# EAGLE board ESC (EAGLE 7.1.0)
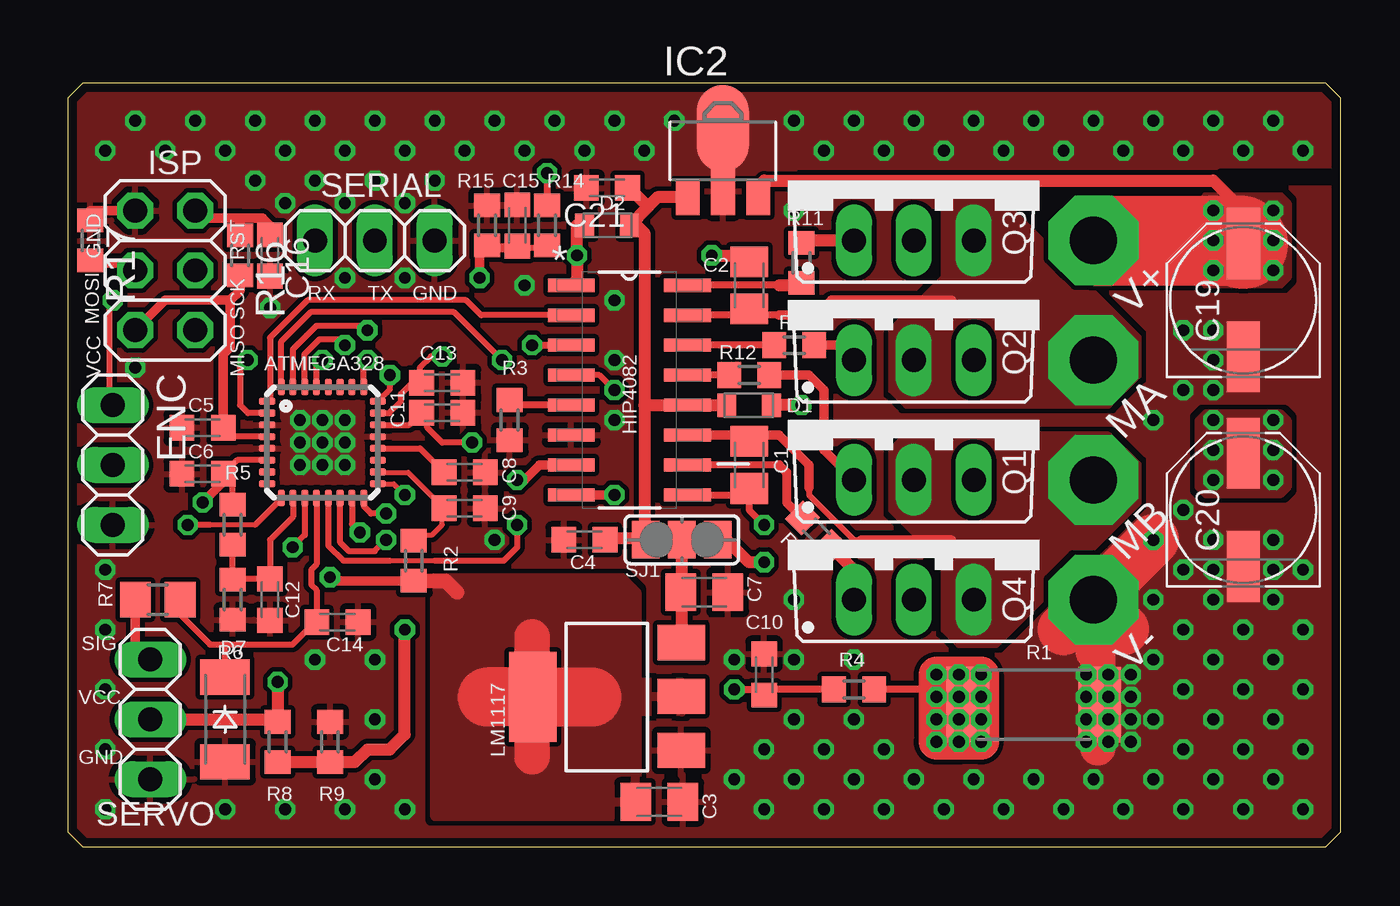
[diagram p0: board, top side]
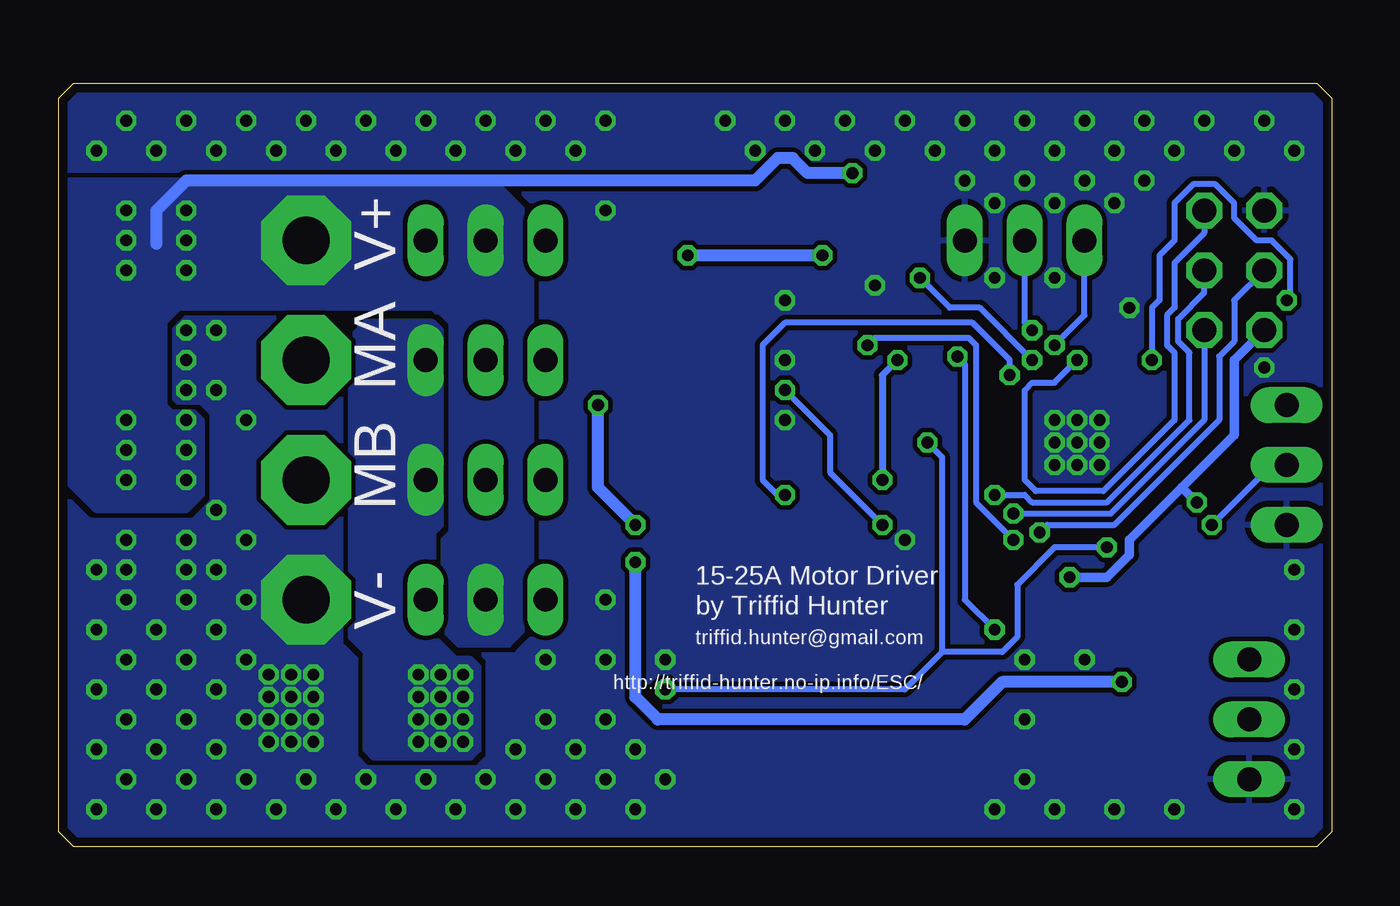
[diagram p1: board, bottom side, seen from below]

Size 53.98 x 32.39 mm. Coordinates in mm from the lower left corner, seen from the top.
Outline: 0,0.64 0.64,0 53.34,0 53.97,0.64 53.97,31.75 53.34,32.39 0.64,32.39 0,31.75 0,0.64
Copper layers (1*16): Top 0.0356mm / dielectric 1.5011mm / Bottom 0.0356mm
Design rules "default *": minimum track width 6mil, minimum drill 13mil, track to track 6mil, track to pad 6mil, pad to pad 6mil, via to via 6mil, smd to smd 6mil, copper to edge 15mil, drill to drill 6mil, minimum pad ring 7mil, minimum via ring 7mil, stop-mask expansion 4mil, vias tented up to drill 0.55mm, thermal gap 10mil
tRestrict: area 48.9,28.3 to 56.2,28.6; 4 lines

## Footprints (pad centres in the part's own frame; a part is rotated, then mirrored left to right if it is on the bottom)
MLF32 = smd 0.7 x 0.3: 1 -2.35,1.75; 2 -2.35,1.25; 3 -2.35,0.75; 4 -2.35,0.25; 5 -2.35,-0.25; 6 -2.35,-0.75; 7 -2.35,-1.25; 8 -2.35,-1.75; 17 2.35,-1.75; 18 2.35,-1.25; 19 2.35,-0.75; 20 2.35,-0.25; 21 2.35,0.25; 22 2.35,0.75; 23 2.35,1.25; 24 2.35,1.75 | smd 0.3 x 0.7: 9 -1.75,-2.35; 10 -1.25,-2.35; 11 -0.75,-2.35; 12 -0.25,-2.35; 13 0.25,-2.35; 14 0.75,-2.35; 15 1.25,-2.35; 16 1.75,-2.35; 25 1.75,2.35; 26 1.25,2.35; 27 0.75,2.35; 28 0.25,2.35; 29 -0.25,2.35; 30 -0.75,2.35; 31 -1.25,2.35; 32 -1.75,2.35
C0805K = smd 1.3 x 1.6: 1 -1,0; 2 1,0
C0603K = smd 1.05 x 1.08: 1 -0.875,0; 2 0.875,0
PANASONIC_D = smd 3 x 1.4: + 2.4,0; - -2.4,0
SOD110-R = smd 0.8 x 1: A 0.95,0; C -0.95,0
SOD-123_MINI-SMA = smd 1.5 x 2.1: A 1.8,0; C -1.8,0
1X03 = drill 1.016 long: 1 -2.54,0; 2 0,0; 3 2.54,0
SOIC127P600X175-16N = smd 1.981 x 0.559: 1 -2.464,4.445; 2 -2.464,3.175; 3 -2.464,1.905; 4 -2.464,0.635; 5 -2.464,-0.635; 6 -2.464,-1.905; 7 -2.464,-3.175; 8 -2.464,-4.445; 9 2.464,-4.445; 10 2.464,-3.175; 11 2.464,-1.905; 12 2.464,-0.635; 13 2.464,0.635; 14 2.464,1.905; 15 2.464,3.175; 16 2.464,4.445
SOT89 = smd 1 x 1.5: 1 -1.499,-1.981; 3 1.499,-1.981 | smd 1 x 2: 2 0,-1.727 | smd 2.2 x 3.7: 2@1 0,0.94
2X03 = drill 1.016 octagon: 1 -2.54,-1.27; 2 -2.54,1.27; 3 0,-1.27; 4 0,1.27; 5 2.54,-1.27; 6 2.54,1.27
SOT223 = smd 1.499 x 2.007: 1 -2.261,-3.15; 2 0.025,-3.15; 3 2.311,-3.15 | smd 3.81 x 2.007: 4 0,3.15
TO220BV = drill 1.016 long: D 0,-2.54; G -2.54,-2.54; S 2.54,-2.54
R2512 = smd 1.8 x 3.2: 1 -2.8,0; 2 2.8,0
R0603 = smd 1 x 1.1: 1 -0.85,0; 2 0.85,0
R0805 = smd 1.3 x 1.5: 1 -0.95,0; 2 0.95,0
SJ_2 = smd 1.168 x 1.6: 1 -1.524,0; 2 0,0; 3 1.524,0

## Placement (x,y rotation side)
ATMEGA328  ATMEGA328  [MLF32]  10.79,17.14 0 top
C1  10uF  [C0805K]  28.89,16.19 90 top
C2  10uF  [C0805K]  28.89,23.81 270 top
C3  10uF  [C0805K]  25.08,1.9 0 top
C4  100nF  [C0603K]  21.91,13.02 180 top
C5  100nF  [C0603K]  5.71,17.78 180 top
C6  100nF  [C0603K]  5.71,15.81 180 top
C7  10uF  [C0805K]  26.99,10.79 0 top
C8  100nF  [C0603K]  16.83,15.88 0 top
C9  100nF  [C0603K]  16.83,14.35 0 top
C10  100nF  [C0603K]  29.53,7.3 90 top
C11  100nF  [C0603K]  15.88,18.41 0 top
C12  100nF  [C0603K]  8.57,10.48 270 top
C13  100nF  [C0603K]  15.88,19.68 0 top
C14  1nF  [C0603K]  11.43,9.53 0 top
C15  100nF  [C0603K]  19.05,26.35 90 top
C16  100nF  [C0603K]  8.57,25.08 270 top
C19  100uF  [PANASONIC_D]  49.85,23.18 90 top
C20  100uF  [PANASONIC_D]  49.85,14.29 90 top
C21  100nF  [C0603K]  22.86,27.94 180 top
D1  D  [SOD110-R]  28.89,18.73 180 top
D2  D  [SOD110-R]  22.86,26.35 0 top
D7  3.3v  [SOD-123_MINI-SMA]  6.67,5.4 270 top
ENC  ENC  [1X03]  1.9,16.19 270 top
HIP4082  HIP4082  [SOIC127P600X175-16N]  23.81,19.37 0 top
IC2  78L12F  [SOT89]  27.78,29.53 0 top
ISP  [2X03]  4.13,24.45 90 top
LM1117  REG1117  [SOT223]  22.86,6.35 90 top
Q1  IRL1404Z  [TO220BV]  35.88,18.1 0 top
Q2  IRL1404Z  [TO220BV]  35.88,23.18 0 top
Q3  IRL1404Z  [TO220BV]  35.88,28.26 0 top
Q4  IRL1404Z  [TO220BV]  35.88,13.02 0 top
R1  0R005  [R2512]  40.96,6.03 0 top
R2  22R  [R0603]  14.67,12.13 270 top
R3  50k  [R0603]  18.73,18.1 90 top
R4  1k  [R0603]  33.34,6.67 0 top
R5  33k  [R0603]  6.99,13.65 90 top
R6  10k  [R0603]  6.99,10.48 90 top
R7  330  [R0805]  3.81,10.48 0 top
R8  6k8  [R0603]  8.89,4.45 90 top
R9  1k  [R0603]  11.11,4.45 270 top
R10  22R  [R0603]  31.75,13.34 315 top
R11  22R  [R0603]  31.11,24.77 90 top
R12  22R  [R0603]  28.89,20 0 top
R13  22R  [R0603]  30.8,21.27 0 top
R14  33k  [R0603]  20.32,26.35 90 top
R15  1k  [R0603]  17.78,26.35 270 top
R16  1k  [R0603]  7.3,25.08 270 top
R17  1k  [R0603]  0.95,25.72 270 top
SERIAL  SERIAL  [1X03]  13.02,25.72 0 top
SERVO  SERVO  [1X03]  3.49,5.4 270 top
SJ1  [SJ_2]  26.04,13.02 0 top

## Library data of the parts
ATMEGA328 = ATMEGA48-88-168-328
C1-C16 C19-C21 R1-R17 = rcl
D1 D2 D7 = diode
ENC ISP SERIAL SERVO = pinhead
HIP4082 = HIP4082; MPN: HIP4082IBZ; OC_FARNELL: 1561948; OC_NEWARK: 61J5960; PACKAGE: SOIC-16; SUPPLIER: INTERSIL
IC2 = linear
LM1117 = burr-brown; MPN: REG1117; OC_FARNELL: 1097566; OC_NEWARK: 14P6981
Q1-Q4 = transistor-power
SJ1 = jumper

## Nets
+5V: ATMEGA328.4 ATMEGA328.6 C3.1 C5.1 C6.1 ISP.2 LM1117.2 R2.2 R5.2 R16.2
+12V: C4.1 C21.1 D1.A D2.A HIP4082.12 IC2.1 SJ1.1
AHI: ATMEGA328.32 HIP4082.7
BHI: ATMEGA328.1 HIP4082.2
DISABLE: ATMEGA328.24 HIP4082.8
GND: ATMEGA328.3 ATMEGA328.5 ATMEGA328.21 C3.2 C4.2 C5.2 C6.2 C7.2 C8.2 C9.2 C10.2 C11.2 C12.2 C13.2 C14.2 C15.2 C16.2 C19.- C20.- C21.2 D7.A ENC.3 HIP4082.6 IC2.2 IC2.2@1 ISP.6 LM1117.1 R1.2 R3.1 R6.1 R9.1 R15.1 R17.1 SERIAL.3 SERVO.3
I_SENSE: ATMEGA328.11 ATMEGA328.22 C10.1 C11.1 R4.1
MISO: ATMEGA328.16 ISP.1
MO_A: C1.2 HIP4082.11 Q1.D Q4.S
MO_B: C2.2 HIP4082.15 Q2.D Q3.S
MOSI: ATMEGA328.15 ISP.4 R17.2
N$1: HIP4082.14 R13.1
N$2: HIP4082.13 R12.1
N$3: HIP4082.5 R3.2
N$5: Q4.G R10.2
N$6: HIP4082.10 R10.1
N$7: C1.1 D1.C HIP4082.9
N$8: C2.1 D2.C HIP4082.1
N$9: ATMEGA328.18 C9.1 R2.1
N$10: HIP4082.16 R11.1
N$11: ATMEGA328.20 C8.1
N$12: ATMEGA328.10 C12.1 R5.1 R6.2
N$13: Q3.G R11.2
N$16: R7.1 SERVO.1
N$17: R8.2 SERVO.2 SJ1.3
N$18: Q1.G R12.2
N$19: ATMEGA328.2 ENC.1
N$20: Q2.G R13.2
N$21: C7.1 LM1117.3 SJ1.2
N$22: ATMEGA328.9 ENC.2
OC1A: ATMEGA328.13 HIP4082.4
OC1B: ATMEGA328.14 HIP4082.3
RESET: ATMEGA328.29 C16.1 ISP.5 R16.1
RX: ATMEGA328.30 SERIAL.1
SCK: ATMEGA328.17 ISP.3
SENSE: Q1.S Q2.S R1.1 R4.2
SERVO_IN: ATMEGA328.12 C14.1 D7.C R7.2
SERVO_VSENSE: ATMEGA328.23 C13.1 R8.1 R9.2
TX: ATMEGA328.31 SERIAL.2
VCC: C19.+ C20.+ IC2.3 Q3.D Q4.D R14.2
VSENSE: ATMEGA328.25 C15.1 R14.1 R15.2

## Tracks (layer width: path | path; a pad name or v marks a point on that pad's centre or on a via)
+5V  (via drill 0.5, 0.5 pad 0.25)
  Top 0.254: ATMEGA328.4 6.97,17.4 C5.1 | 23.81,1.9 C3.1 | R5.2 6.99,15.42 C6.1 | C6.1 6.59,15.48 | ATMEGA328.6 7.17,16.4 C6.1
  Top 0.406: R2.2 11.26,11.28 v11.11,11.43 | 6.88,23.18 4.13,23.18 ISP.2 | 6.59,15.48 v5.71,14.6 | C5.1 6.59,20.88 6.88,21.17 6.88,23.18 | R16.2 7.3,23.6 6.88,23.18
  Top 0.61: R2.2 16.03,11.28 16.51,10.79
  Top 1.5: 19.68,3.81 19.68,6.35 19.68,8.89
  Top 2.5: 17.78,6.35 19.68,6.35 22.22,6.35
  Bottom 0.406: v11.11,11.43 9.52,11.43 8.57,12.38 8.57,13.02 6.35,15.24 | 6.35,15.24 4.13,17.46 4.13,20.64 ISP.2 | 6.35,15.24 v5.71,14.6
  pour Top (isolate 0.203): 15.56,1.27 15.56,11.43 23.49,11.43 24.13,10.79 24.13,6.99 26.04,6.99 26.04,5.71 24.13,5.71 24.13,1.27
+12V
  Top 0.508: 24.45,18.73 24.45,26.04 24.13,26.35 D2.A 24.61,27.15 | 24.45,18.73 HIP4082.12 D1.A | 24.45,18.73 24.45,13.08 | 24.45,13.08 SJ1.1 | 24.45,13.08 22.85,13.08 C4.1 | IC2.1 25,27.55 24.61,27.15 | C21.1 23.81,27.94 24.61,27.15
AHI  (via drill 0.5)
  Top 0.254: v18.42,20.64 16.38,22.67 10.29,22.67 9.04,21.43 ATMEGA328.32
  Top 0.406: v19.05,15.56 19.37,15.56 20,16.19 HIP4082.7
  Bottom 0.305: v18.42,20.64 19.05,20 v19.05,15.56
BHI
  Top 0.254: 21.27,22.54 17.53,22.54 16.89,23.18 10.16,23.18 8.57,21.59 8.57,19.02 ATMEGA328.1
  Top 0.305: HIP4082.2 21.27,22.54
DISABLE  (via drill 0.5)
  Top 0.254: v13.65,20 13.65,19.4 ATMEGA328.24
  Top 0.406: v23.18,14.92 HIP4082.8
  Bottom 0.254: v13.65,20 13.65,20.64 15.24,22.22 23.18,22.22 24.13,21.27 24.13,15.56 23.49,14.92 v23.18,14.92
GND  (via drill 0.5, 2 pad 3.81)
  Top 0.406: ISP.6 0.95,26.99
  Top 0.508: IC2.2@1 IC2.2
  Top 0.762: 43.5,8.26 43.69,8.06
  Top 1.5: v43.5,10.48 43.5,8.26 | 43.69,8.06 43.69,4.19
  Top 2.184: v43.5,10.48 42.23,9.21 | v43.5,10.48 44.77,9.21 | v43.5,10.48 v46.04,13.02
  other vias: 28.26,2.86 18.1,13.02 30.8,2.86 33.34,2.86 43.18,7.3 44.13,7.3 44.13,6.35 43.18,6.35 43.18,5.4 44.13,5.4 44.13,4.45 43.18,4.45 13.02,5.4 13.02,7.94 28.26,7.94 13.02,2.86 33.34,7.94 30.8,7.94 1.59,11.75 1.59,9.21 1.59,6.67 1.59,4.13 1.59,1.59 6.67,1.59 9.21,1.59 11.75,1.59 14.29,1.59 29.53,1.59 32.07,1.59 34.61,1.59 10.48,7.94 32.07,4.13 34.61,4.13 30.8,5.4 30.8,26.99 30.8,10.48 23.18,23.18 19.37,23.81 23.18,18.1 23.18,20.64 14.29,24.13 11.75,24.13 11.75,27.3 14.29,27.3 9.21,27.3 33.34,5.4 42.23,1.59 39.69,1.59 44.77,1.59 10.79,17.14 10.79,18.1 9.84,18.1 9.84,17.14 9.84,16.19 10.79,16.19 11.75,16.19 11.75,17.14 11.75,18.1 48.58,20.64 48.58,21.91 48.58,19.37 48.58,11.75 48.58,13.02 48.58,10.48 51.12,10.48 51.12,11.75 51.12,13.02 48.58,7.94 46.04,7.94 46.04,5.4 48.58,5.4 51.12,5.4 51.12,7.94 49.85,6.67 47.31,6.67 46.04,2.86 48.58,2.86 51.12,2.86 49.85,4.13 47.31,4.13 47.31,1.59 49.85,1.59 52.39,1.59 52.39,4.13 52.39,6.67 52.39,9.21 47.31,9.21 46.04,10.48 46.04,18.1 30.8,30.8 33.34,30.8 35.88,30.8 38.42,30.8 40.96,30.8 43.5,30.8 46.04,30.8 48.58,30.8 51.12,30.8 49.85,29.53 47.31,29.53 44.77,29.53 42.23,29.53 39.69,29.53 37.15,29.53 23.18,30.8 20.64,30.8 18.1,30.8 19.37,29.53 16.83,29.53 15.56,30.8 14.29,29.53 13.02,30.8 13.02,28.26 15.56,28.26 10.48,28.26 11.75,29.53 10.48,30.8 9.21,29.53 7.94,30.8 7.94,28.26 6.67,29.53 5.4,30.8 4.13,29.53 2.86,30.8 1.59,29.53 52.39,29.53 47.31,11.75 52.39,11.75 21.91,29.53 24.45,29.53 25.72,30.8 32.07,29.53 34.61,29.53 47.31,21.91 47.31,19.37 47.31,14.29 49.85,9.21 45.09,7.3 45.09,6.35 45.09,5.4 45.09,4.45 2.86,20.32 8.57,22.86 35.88,2.86 38.42,2.86 40.96,2.86 43.5,2.86 37.15,1.59 29.53,4.13
  pour Bottom (isolate 0.203, rank 6): 0.32,0.32 53.66,0.32 53.66,32.07 0.32,32.07
  pour Top (isolate 0.203, rank 6): 0.32,0.32 53.66,0.32 53.66,32.07 0.32,32.07
  pour Top (isolate 0.203, no thermals): 48.26,22.54 51.44,22.54 51.75,22.22 51.75,19.37 51.44,19.05 48.26,19.05 47.94,19.37 47.94,22.22
  pour Top (isolate 0.203, no thermals): 48.26,13.65 51.44,13.65 51.75,13.34 51.75,10.16 51.44,9.84 48.26,9.84 47.94,10.16 47.94,13.34
  pour Top (no thermals): 24.77,32.07 30.8,32.07 30.8,28.57 24.77,28.57
  pour Top (isolate 0.203, rank 6, no thermals): 44.13,12.7 44.45,12.7 45.72,11.43 45.72,4.13 45.4,3.81 41.91,3.81 41.28,4.45 41.28,9.84
  pour Bottom (isolate 0.203, no thermals): 42.55,7.62 42.55,4.13 42.86,3.81 45.4,3.81 45.72,4.13 45.72,7.62 45.4,7.94 42.86,7.94
I_SENSE  (via drill 0.5)
  Top 0.254: C10.1 29.53,6.67 | v17.15,17.15 15.87,17.15 15.24,17.78 15.24,18.18 C11.1 14.48,17.9 ATMEGA328.22 | ATMEGA328.11 10.04,13.22 v9.52,12.7
  Top 0.305: R4.1 29.53,6.67 v28.26,6.67
  Bottom 0.254: 16.51,8.26 18.1,6.67 v28.26,6.67 | v9.52,12.7 11.75,12.7 13.34,11.11 13.34,8.89 13.97,8.26 16.51,8.26 | 16.51,8.26 16.51,16.51 v17.15,17.15
MISO  (via drill 0.5)
  Top 0.254: ATMEGA328.16 12.54,14.44 12.86,14.13 v13.49,14.13
  Bottom 0.254: ISP.1 5.4,18.1 9.37,14.13 v13.49,14.13
MO_A  (via drill 2 pad 3.81)
  Top 0.254: 31.43,15.24 31.43,14.92 33.34,13.02 33.65,13.02
  Top 0.406: 31.43,15.24 31.43,16.19 30.16,17.46 28.89,17.46 | 37.47,13.02 33.65,13.02 | 28.89,17.46 HIP4082.11 | C1.2 28.89,17.46
  other vias: 43.5,15.56
  pour Top (isolate 0.203, no thermals): 44.13,17.46 35.56,17.46 34.93,16.83 34.93,14.29 37.15,12.07 37.15,9.21 37.78,8.57 39.37,8.57 45.4,14.61 45.4,16.19
MO_B  (via drill 2 pad 3.81)
  Top 0.305: 30.16,22.54 28.89,22.54 | 28.89,22.54 HIP4082.15 | C2.2 28.89,22.54
  Top 0.406: 37.47,23.18 32.39,23.18 31.75,22.54 30.16,22.54
  other vias: 43.5,20.64
  pour Top (isolate 0.203, no thermals): 35.56,18.73 44.13,18.73 45.4,20 45.4,21.59 39.37,27.62 37.78,27.62 37.15,26.99 37.15,24.13 34.93,21.91 34.93,19.37
MOSI  (via drill 0.5)
  Top 0.254: 1.06,24.77 R17.2 | ATMEGA328.15 12.04,13.67 v12.38,13.34
  Top 0.406: ISP.4 2.54,24.77 1.06,24.77
  Bottom 0.254: v12.38,13.34 12.07,13.65 9.21,13.65 4.76,18.1 4.76,20.8 4.13,21.43 4.13,23.18 ISP.4
N$1
  Top 0.305: R13.1 HIP4082.14
  Top 0.406: 30.16,21.27 R13.1
N$2
  Top 0.305: R12.1 HIP4082.13
N$3
  Top 0.305: HIP4082.5 18.95,18.73 R3.2
N$5
  Top 0.305: 32.39,12.7 32.38,12.7 R10.2
  Top 0.508: 32.39,12.7 33.34,11.75 Q4.G
N$6
  Top 0.305: 31.11,13.97 | 31.11,13.97 R10.1 | 30.16,16.19 HIP4082.10
  Top 0.381: 30.16,16.19 30.48,15.87 30.48,14.6 31.11,13.97
N$7  (via drill 0.5)
  Top 0.305: HIP4082.9 28.62,14.92 C1.1 28.89,14.29 v29.53,13.65
  Top 0.508: v31.11,18.73 D1.C
  Bottom 0.508: v29.53,13.65 31.11,15.24 v31.11,18.73
N$8  (via drill 0.5)
  Top 0.381: 21.59,26.35 D2.C
  Top 0.508: 21.59,26.35 v21.59,25.08 21.59,24.05 HIP4082.1 | v27.31,25.08 28.62,25.08 C2.1
  Bottom 0.508: v21.59,25.08 v27.31,25.08
N$9
  Top 0.203: R2.1 14.92,13.23 15.45,13.23 15.87,13.65 15.87,14.27 C9.1 14.43,15.87 13.17,15.87
  Top 0.254: 13.17,15.87 ATMEGA328.18
N$10
  Top 0.305: R11.1 30.9,23.92 30.8,23.81 | 30.16,23.81 HIP4082.16
  Top 0.508: 30.16,23.81 30.8,23.81
N$11
  Top 0.254: ATMEGA328.20 14.93,16.9 C8.1
N$12
  Top 0.254: R5.1 R6.2 7.01,11.35 C12.1 8.57,13.02 9.54,13.99 ATMEGA328.10
N$13
  Top 0.305: 31.11,25.72 R11.2
  Top 0.508: Q3.G 31.11,25.72
N$16
  Top 0.406: R7.1 2.86,8.57 SERVO.1
N$17  (via drill 0.5)
  Top 0.305: SJ1.3 27.62,13.02
  Top 0.508: v29.53,12.07 28.89,12.07 27.94,13.02 27.62,13.02 | SERVO.2 8.79,5.4 R8.2 v8.89,6.99
  Bottom 0.508: v8.89,6.99 13.97,6.99 15.56,5.4 28.58,5.4 29.53,6.35 v29.53,12.07
N$18
  Top 0.305: 29.84,20 R12.2
  Top 0.406: Q1.G 32.07,16.83 32.07,19.37 31.43,20 29.84,20
N$19  (via drill 0.5 pad 0.25)
  Top 0.254: ATMEGA328.2 7.64,18.4 7.3,18.73 7.3,20.32 v7.62,20.64 | v1.9,23.18 1.75,23.02 1.75,18.89 ENC.1
  Bottom 0.254: v1.9,23.18 1.75,23.34 1.75,24.92 2.54,25.72 3.17,25.72 4.13,26.67 4.13,27.31 4.92,28.1 5.87,28.1 6.67,27.31 6.67,25.72 7.3,25.08 7.3,23.18 7.62,22.86 v7.62,20.64
N$20
  Top 0.305: R13.2 32.07,21.27
  Top 0.406: 32.07,21.27 32.7,21.27 Q2.G
N$21
  Top 0.305: C7.1 26.04,10.79 | 26.04,8.57 26.04,8.64 LM1117.3
  Top 0.508: 26.04,8.57 26.04,10.79 SJ1.2
N$22  (via drill 0.5 pad 0.25)
  Top 0.203: 7.94,13.65 6.03,13.65
  Top 0.254: ATMEGA328.9 9.04,14.76 7.94,13.65 | 6.03,13.65 v5.08,13.65
  Bottom 0.254: v5.08,13.65 2.54,16.19 ENC.2
OC1A  (via drill 0.5)
  Top 0.203: 15.56,12.13 13.65,12.13
  Top 0.254: 15.56,12.13 18.48,12.13 19.05,12.7 v19.05,13.65 | 13.65,12.13 11.68,12.13 11.04,12.77 ATMEGA328.13 | v23.18,19.37 22.54,20 HIP4082.4
  Top 0.305: HIP4082.4 21.27,20
  Bottom 0.254: v23.18,19.37 21.27,17.46 21.27,15.87 v19.05,13.65
OC1B  (via drill 0.5)
  Top 0.254: v13.49,13.02 13.02,12.54 11.91,12.54 11.54,12.9 ATMEGA328.14
  Top 0.305: v19.68,21.27 HIP4082.3
  Bottom 0.254: v13.49,13.02 15.08,14.6 15.08,21.27 15.4,21.59 19.37,21.59 v19.68,21.27
RESET  (via drill 0.5)
  Top 0.254: ATMEGA328.29 10.54,20.39 v10.79,20.64
  Top 0.406: 7.3,26.67 8.26,26.67 8.57,26.35 C16.1 | R16.1 7.3,26.67 | 7.3,26.67 5.71,26.67 ISP.5
  Bottom 0.254: ISP.5 5.4,26.04 6.67,24.77 6.67,22.86 6.99,22.54 6.99,21.27 6.67,20.95 6.67,18.1 9.68,15.08 12.54,15.08 13.02,15.56 13.02,19.37 12.7,19.68 11.75,19.68 v10.79,20.64
RX  (via drill 0.5)
  Top 0.254: v11.75,21.27 11.49,21.53 10.67,21.53 10.03,20.89 10.03,19.49 ATMEGA328.30 | ATMEGA328.30
  Bottom 0.254: v11.75,21.27 10.48,22.54 SERIAL.1
SCK  (via drill 0.5)
  Top 0.203: ATMEGA328.17 13.82,15.4 v14.29,14.92
  Bottom 0.254: v14.29,14.92 13.02,14.92 12.7,14.6 9.52,14.6 6.03,18.1 6.03,20.95 6.51,21.43 6.51,22.38 5.4,23.49 ISP.3
SENSE  (via drill 0.5)
  Top 0.254: 37.15,6.67 37.78,6.03 R1.1
  Top 0.305: 37.15,6.67 R4.2
  Top 0.61: 37.78,6.03 v37.78,5.4 v37.78,4.45 | v38.73,4.45 v38.73,5.4 v38.73,7.3
  Top 1.499: v36.83,7.3 v37.78,7.3 | v36.83,4.45 v37.78,4.45
  Top 1.5: v36.83,7.3 v36.83,4.45 | 37.78,6.03 v37.78,6.35 v37.78,7.3 v38.73,7.3 v38.73,4.45 v37.78,4.45 37.78,6.03
  other vias: 38.73,6.35 36.83,5.4 36.83,6.35
  pour Bottom (isolate 0.203, no thermals): 38.1,22.22 40.96,22.22 41.59,21.59 41.59,8.89 40.96,8.26 40.96,4.13 40.64,3.81 36.51,3.81 36.2,4.13 36.2,7.62 36.51,7.94 37.15,7.94 38.1,8.89 38.1,13.34 37.78,13.65 37.78,21.91
SERVO_IN
  Top 0.254: 6.67,8.57 6.03,8.57 4.76,9.84 R7.2 | 6.67,8.57 9.52,8.57 10.48,9.52 C14.1 10.54,9.54 10.54,10.89 10.32,11.11 10.32,11.75 10.54,11.97 ATMEGA328.12 | D7.C 6.67,8.57
SERVO_VSENSE  (via drill 0.5)
  Top 0.254: v15.87,20.8 15.4,20.8 14.92,20.32 14.92,19.76 | 14.92,19.76 C13.1 | 14.92,19.76 14.68,19.76 14.13,19.21 14.13,18.89 13.63,18.4 ATMEGA328.23
  Top 0.508: v14.29,9.21 14.29,4.76 13.65,4.13 12.7,4.13 12.17,3.59 R9.2 R8.1
  Bottom 0.254: v15.87,20.8 15.56,20.48 15.56,10.48 v14.29,9.21
TX  (via drill 0.5)
  Top 0.254: v12.7,21.91 12.51,22.1 10.54,22.1 9.54,21.1 ATMEGA328.31
  Bottom 0.254: v12.7,21.91 13.02,22.22 SERIAL.2
VCC  (via drill 0.5 pad 0.25, 2 pad 3.81)
  Top 0.305: v20.32,28.58 R14.2
  Top 0.508: IC2.3 29.28,28.01 29.53,28.26 48.58,28.26 49.85,26.99 C19.+ | 43.5,26.99 v43.5,25.72
  Top 3.81: v43.5,25.72 v48.58,25.72 49.71,25.72 C19.+
  Bottom 0.508: v20.32,28.58 22.22,28.58 22.86,29.21 23.49,29.21 24.45,28.26 48.58,28.26 49.85,26.99 C19.+
  other vias: 48.58,24.45 51.12,24.45 51.12,25.72 51.12,26.99 48.58,26.99 48.58,16.83 48.58,15.56 48.58,18.1 51.12,18.1 51.12,16.83 51.12,15.56
  pour Bottom (isolate 0.203, rank 2, no thermals): 33.97,9.53 34.93,8.57 37.15,8.57 37.78,9.21 37.78,13.02 37.47,13.34 37.47,22.22 38.1,22.86 48.9,22.86 49.53,22.22 49.53,18.73 49.21,18.41 48.26,18.41 47.94,18.1 47.94,14.92 48.58,14.29 52.39,14.29 53.66,15.56 53.66,28.26 35.56,28.26 33.97,26.67
  pour Top (isolate 0.203, no thermals): 49.85,27.62 51.44,27.62 51.75,27.3 51.75,24.13 51.44,23.81 48.26,23.81 47.94,24.13 47.94,27.3 48.26,27.62
  pour Top (isolate 0.203, rank 2, no thermals): 47.94,18.1 48.26,18.41 51.44,18.41 51.75,18.1 51.75,15.24 51.44,14.92 48.26,14.92 47.94,15.24
VSENSE  (via drill 0.5)
  Top 0.254: 20.32,25.4 19.05,25.4 | ATMEGA328.25 12.54,20.48 v12.7,20.64
  Top 0.305: 20.32,25.4 R14.1 | C15.1 19.05,25.4 | 17.78,25.4 R15.2
  Top 0.381: 19.05,25.4 17.78,25.4 17.46,25.08
  Top 0.406: 17.46,25.08 v17.46,24.13
  Bottom 0.254: v12.7,20.64 14.92,22.86 16.19,22.86 v17.46,24.13

## Text on the board
tNames: GND | RST | RX | TX | GND | MOSI | SCK | V+ | VCC | MISO | MA | MB | SIG | V- | VCC | GND
bNames: V+ | MA | MB | 15-25A Motor Driver | by Triffid Hunter | V- | triffid.hunter@gmail.com | http://triffid-hunter.no-ip.info/ESC/